# EAGLE board schematic2 (EAGLE 7.2.0)
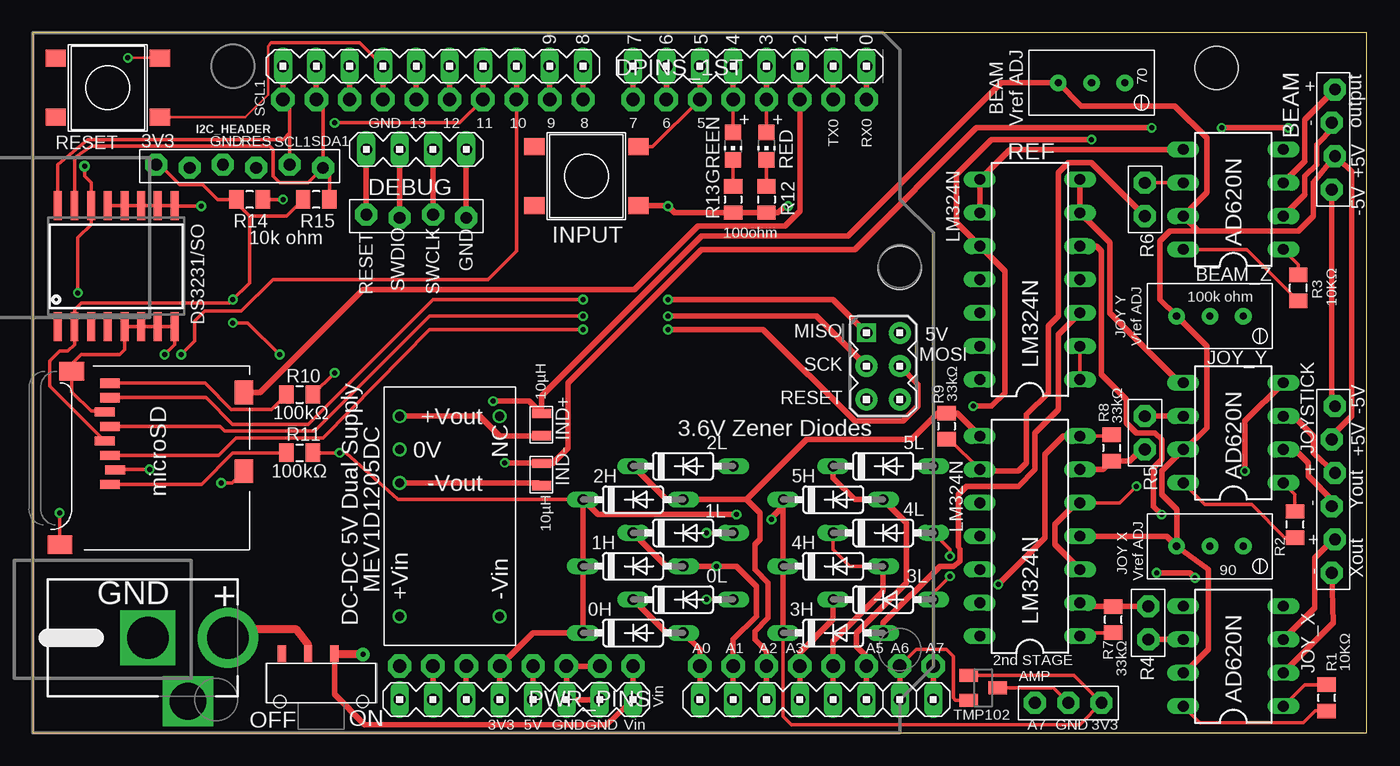
[diagram p0: board, top side]
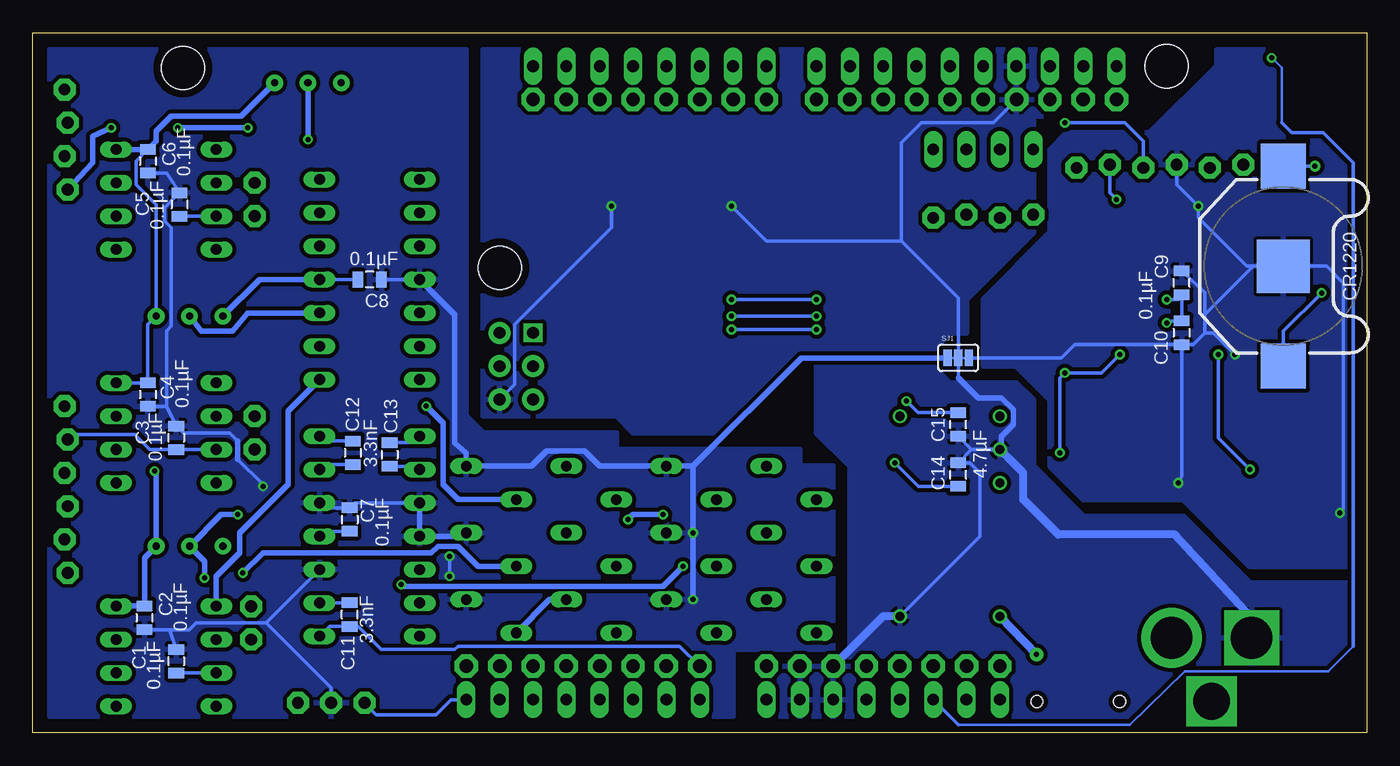
[diagram p1: board, bottom side, seen from below]

Size 101.6 x 53.34 mm. Coordinates in mm from the lower left corner, seen from the top.
Outline: 0,0 101.6,0 101.6,53.34 0,53.34 0,0
Copper layers (1*16): Top 0.0356mm / dielectric 1.5011mm / Bottom 0.0356mm
Design rules "LaenPCBOrder *": minimum track width 6mil, minimum drill 13mil, track to track 6mil, track to pad 6mil, pad to pad 6mil, via to via 6mil, smd to smd 6mil, copper to edge 15mil, drill to drill 6mil, minimum pad ring 7mil, minimum via ring 7mil, stop-mask expansion 3mil, vias tented up to drill 30mil, thermal gap 10mil

## Footprints (pad centres in the part's own frame; a part is rotated, then mirrored left to right if it is on the bottom)
DO35-7 = drill 0.813 long: A 3.81,0; C -3.81,0
R-TRIMMER_67W_TT_ELEC = drill 0.541 pad 1.27: P$1 -2.54,0; P$2 0,0; P$3 2.54,0
DIL14 = drill 0.813 long: 1 -7.62,-3.81; 2 -5.08,-3.81; 3 -2.54,-3.81; 4 0,-3.81; 5 2.54,-3.81; 6 5.08,-3.81; 7 7.62,-3.81; 8 7.62,3.81; 9 5.08,3.81; 10 2.54,3.81; 11 0,3.81; 12 -2.54,3.81; 13 -5.08,3.81; 14 -7.62,3.81
1X03 = drill 0.9 pad 1.676 octagon: 1 -2.54,0; 2 0,0; 3 2.54,0
1X08-CLEANBIG = drill 1.016 pad 1.778 octagon: 1 -8.89,0; 2 -6.35,0; 3 -3.81,0; 4 -1.27,0; 5 1.27,0; 6 3.81,0; 7 6.35,0; 8 8.89,0
1X04_LOCK = drill 0.9 pad 1.676 octagon: 1 -3.81,0.127; 2 -1.27,-0.127; 3 1.27,0.127; 4 3.81,-0.127
DIL08 = drill 0.813 long: 1 -3.81,-3.81; 2 -1.27,-3.81; 3 1.27,-3.81; 4 3.81,-3.81; 5 3.81,3.81; 6 1.27,3.81; 7 -1.27,3.81; 8 -3.81,3.81
0805 = smd 0.8 x 1.2: 1 -0.9,0; 2 0.9,0
1X10-CLEANBIG = drill 1.016 pad 1.778 octagon: 1 -11.43,0; 2 -8.89,0; 3 -6.35,0; 4 -3.81,0; 5 -1.27,0; 6 1.27,0; 7 3.81,0; 8 6.35,0; 9 8.89,0; 10 11.43,0
1X06-LOCK = drill 0.9 pad 1.676 octagon: 1 -6.35,0.127; 2 -3.81,-0.127; 3 -1.27,0.127; 4 1.27,-0.127; 5 3.81,0.127; 6 6.35,-0.127
SO16W = smd 0.6 x 2.2: 1 -4.445,-4.6; 2 -3.175,-4.6; 3 -1.905,-4.6; 4 -0.635,-4.6; 5 0.635,-4.6; 6 1.905,-4.6; 7 3.175,-4.6; 8 4.445,-4.6; 9 4.445,4.6; 10 3.175,4.6; 11 1.905,4.6; 12 0.635,4.6; 13 -0.635,4.6; 14 -1.905,4.6; 15 -3.175,4.6; 16 -4.445,4.6
I_0805 = smd 0.7 x 1.45: P$1 -0.85,0; P$2 0.85,0
PUSHBUTTON_DPST_SMD = smd 1.55 x 1.3: P 3.975,-2.25; P$1 -3.975,-2.25; S 3.975,2.25; S$1 -3.975,2.25
CHIPLED_0805 = smd 1.2 x 1.2: A 0,-1.05; C 0,1.05
R0805 = smd 1.1 x 1.4: 1 -1,0; 2 1,0
1X02 = drill 0.9 pad 1.676 octagon: 1 -1.27,0; 2 1.27,0
PAD-JUMPER-3-3OF3_NC_BY_TRACE_YES_SILK_FULL_BOX = smd 0.635 x 1.27: 1 -0.813,0; 2 0,0; 3 0.813,0
STAND-OFF = hole 3.302: 0,0
SOT23 = smd 1 x 1.4: 1 -0.95,-1.1; 2 0.95,-1.1; 3 0,1.1
DUE_HALF_SHIELD_A7-ANALOG = drill 0.9 pad 1.422 long: 2 58.42,50.8; 3 55.88,50.8; 3V3 35.56,2.54; 4 53.34,50.8; 5 50.8,50.8; 5V1 38.1,2.54; 6 48.26,50.8; 7 45.72,50.8; 8 41.91,50.8; 9 39.37,50.8; 10 36.83,50.8; 11 34.29,50.8; 12 31.75,50.8; 13 29.21,50.8; A0 50.8,2.54; A1 53.34,2.54; A2 55.88,2.54; A3 58.42,2.54; A4 60.96,2.54; A5 63.5,2.54; A6 66.04,2.54; A7 68.58,2.54; AREF 24.13,50.8; GND1 26.67,50.8; GND_1 40.64,2.54; GND_2 43.18,2.54; GND_DEBUG 33.02,44.45; IOREF1 30.48,2.54; NC1 27.94,2.54; RESET 33.02,2.54; RESET_DEBUG 25.4,44.45; RX0 63.5,50.8; SCL1 19.05,50.8; SDA1 21.59,50.8; SWCLK_DEBUG 30.48,44.45; SWDIO_DEBUG 27.94,44.45; TX0 60.96,50.8; VIN1 45.72,2.54 | drill 0.9 pad 1.676: 5V_SPI 66.04,30.48; GND_SPI 66.04,25.4; MOSI_SPI 66.04,27.94; RESET_SPI 63.5,25.4; SCK_SPI 63.5,27.94 | drill 0.9 pad 1.422 square: MISO_SPI 63.5,30.48
SWITCH_SMD_RA_SPDT = smd 0.635 x 1.27: P$1 -3,3.75; P$2 -1,3.75; P$3_COMMON 1,3.75 | hole 0.9: -3.15,0.1; 3.15,0.1
DCDC_CONVERTOR-MEV1D = drill 0.7: P$1_-VIN -7.62,-3.81; P$7_NC 7.62,-3.81; P$8_VOUT 7.62,3.81; P$9_0V 5.08,3.81; P$10_-VOUT 2.54,3.81; P$14_VIN -7.62,3.81
MICROSD = smd 0.7 x 1.5: 1 9,-10.64; 2 7.9,-10.24; 3 6.8,-10.64; 4 5.7,-11.04; 5 4.6,-10.64; 6 3.5,-11.04; 7 2.4,-10.64; 8 1.3,-10.64 | smd 1.8 x 1.4: CD1 2,-0.44; CD2 8,-0.44 | smd 1.4 x 1.9: MT1 0.4,-13.54; MT2 13.6,-14.44
CR1220_BATTERY_HOLDER_SMD = smd 4.064 x 4.064: GND 0,0 | smd 3.429 x 3.429: P$1 -7.62,0; P$2 7.62,0
POWER_JACK_DC_2,1MM = drill 3.175 pad 4.572: P$1 0,0 | drill 3.175 square: P$2 6.096,0 | drill 2.8 square: P$3 3.048,4.826

## Placement (x,y rotation side)
0H  DIODE_ZENERDO-35_AXIAL  [DO35-7]  45.72,7.62 0 top
0L  DIODE_ZENERDO-35_AXIAL  [DO35-7]  49.53,10.16 0 top
1H  DIODE_ZENERDO-35_AXIAL  [DO35-7]  45.72,12.7 0 top
1L  DIODE_ZENERDO-35_AXIAL  [DO35-7]  49.53,15.24 0 top
2H  DIODE_ZENERDO-35_AXIAL  [DO35-7]  45.72,17.78 0 top
2L  DIODE_ZENERDO-35_AXIAL  [DO35-7]  49.53,20.32 0 top
3H  3.6V_DIODE  [DO35-7]  60.96,7.62 0 top
3L  DIODE_ZENERDO-35_AXIAL  [DO35-7]  64.77,10.16 0 top
4H  DIODE_ZENERDO-35_AXIAL  [DO35-7]  60.96,12.7 0 top
4L  DIODE_ZENERDO-35_AXIAL  [DO35-7]  64.77,15.24 0 top
5H  DIODE_ZENERDO-35_AXIAL  [DO35-7]  60.96,17.78 0 top
5L  DIODE_ZENERDO-35_AXIAL  [DO35-7]  64.77,20.32 0 top
70  100k ohm  [R-TRIMMER_67W_TT_ELEC]  80.64,49.53 180 top
90  100k ohm  [R-TRIMMER_67W_TT_ELEC]  89.66,14.22 180 top
AMP  LM324N  [DIL14]  75.95,14.99 90 top
ANALOG7_HEADER  [1X03]  78.87,2.29 0 top
ANALOG_IN  [1X08-CLEANBIG]  59.69,5.08 180 top
BEAM  PINHD-1X4  [1X04_LOCK]  99.06,45.21 270 top
BEAM_Z  AD620N  [DIL08]  91.44,40.64 90 top
C1  0.1µF  [0805]  90.68,5.46 270 bottom
C2  0.1µF  [0805]  93.09,8.76 270 bottom
C3  0.1µF  [0805]  90.68,22.48 270 bottom
C4  0.1µF  [0805]  92.84,25.78 270 bottom
C5  0.1µF  [0805]  90.42,40.26 270 bottom
C6  0.1µF  [0805]  92.84,43.56 270 bottom
C7  0.1µF  [0805]  77.47,16.26 270 bottom
C8  0.1µF  [0805]  75.95,34.54 180 bottom
C9  0.1µF  [0805]  14.1,34.29 90 bottom
C10  0.1µF  [0805]  14.1,30.48 270 bottom
C11  3.3nF  [0805]  77.47,9.02 90 bottom
C12  3.3nF  [0805]  77.22,21.34 270 bottom
C13  3.3nF  [0805]  74.42,21.21 270 bottom
C14  4.7uF  [0805]  31.11,19.68 90 bottom
C15  4.7µF  [0805]  31.11,23.5 90 bottom
DEBUG  [1X04_LOCK]  29.21,39.37 180 top
DPINS_1ST  [1X08-CLEANBIG]  54.61,48.26 0 top
DPINS_2ND  PINHD-1X10CLEAN  [1X10-CLEANBIG]  30.48,48.26 0 top
I2C_HEADER  [1X06-LOCK]  15.75,43.18 180 top
IC6  DS3231/SO  [SO16W]  6.35,35.56 0 top
IND+  10µH  [I_0805]  38.73,23.5 270 top
IND-  10µH  [I_0805]  38.73,19.68 270 top
INPUT  PUSHBUTTON_DPST_SMD  [PUSHBUTTON_DPST_SMD]  42.16,42.42 180 top
JOY_X  AD620N  [DIL08]  91.44,5.84 90 top
JOY_Y  AD620N  [DIL08]  91.44,22.86 90 top
JOYSTICK  [1X06-LOCK]  99.06,18.54 90 top
LED1  GREEN  [CHIPLED_0805]  53.34,44.7 180 top
LED2  RED  [CHIPLED_0805]  55.88,44.7 180 top
PWR_PINS  [1X08-CLEANBIG]  36.83,5.08 180 top
R1  10KΩ  [R0805]  98.55,2.67 90 top
R2  10KΩ  [R0805]  96.14,15.88 90 top
R3  10KΩ  [R0805]  96.39,33.91 90 top
R4  [1X02]  84.96,8.38 90 top
R5  [1X02]  84.71,22.86 270 top
R6  [1X02]  84.71,40.64 270 top
R7  33kΩ  [R0805]  82.3,8.64 90 top
R8  33kΩ  [R0805]  82.17,21.72 270 top
R9  33kΩ  [R0805]  69.6,23.37 270 top
R10  100kΩ  [R0805]  20.32,25.78 0 top
R11  100kΩ  [R0805]  20.32,21.34 0 top
R12  100ohm  [R0805]  55.88,40.64 270 top
R13  100ohm  [R0805]  53.34,40.64 270 top
R14  10k ohm  [R0805]  16.51,40.64 180 top
R15  10k ohm  [R0805]  21.59,40.64 180 top
REF  LM324N  [DIL14]  75.95,34.54 90 top
RESET  PUSHBUTTON  [PUSHBUTTON_DPST_SMD]  5.71,49.15 180 top
SJ1  [PAD-JUMPER-3-3OF3_NC_BY_TRACE_YES_SILK_FULL_BOX]  31.11,28.57 0 bottom
STANDOFF1  STAND-OFF  [STAND-OFF]  15.24,50.8 0 top
STANDOFF2  STAND-OFF  [STAND-OFF]  66.04,35.43 0 top
STANDOFF3  STAND-OFF  [STAND-OFF]  90.17,50.67 0 top
TMP102  LM62  [SOT23]  72.39,3.43 270 top
TRIMMER  100k ohm  [R-TRIMMER_67W_TT_ELEC]  89.66,31.75 180 top
U$1  DUE_HALF_SHIELD_A7-ANALOG  [DUE_HALF_SHIELD_A7-ANALOG]  0,0 0 top
U$2  SWITCH_SLIDE_SMD_SPDT  [SWITCH_SMD_RA_SPDT]  21.97,2.29 0 top
U$3  DC-DC_CONVERTER_DUAL_SUPPLY  [DCDC_CONVERTOR-MEV1D]  31.75,16.51 90 top
U$11  MICROSD  [MICROSD]  16.51,27.94 270 top
U$12  CR1220_BATTERY_HOLDERSMD  [CR1220_BATTERY_HOLDER_SMD]  6.35,35.56 270 bottom
U$28  POWER_JACK_2,1MM  [POWER_JACK_DC_2,1MM]  14.86,7.24 180 top

## Library data of the parts
0H 0L 1H 1L 2H 2L 3H 3L 4H 4L 5H 5L AMP ANALOG7_HEADER ANALOG_IN BEAM C1-C15 DEBUG DPINS_1ST DPINS_2ND I2C_HEADER IC6 IND+ IND- INPUT JOYSTICK LED1 LED2 PWR_PINS R1-R15 REF RESET SJ1 TMP102 TRIMMER U$1-U$3 U$11 U$12 U$28 = Felicia_force_logger
70 90 STANDOFF1-STANDOFF3 = miller
BEAM_Z JOY_X JOY_Y = Felicia_force_logger; MF: ALTERA CORPORATION; MPN: AD620AN; OC_FARNELL: 1523782; OC_NEWARK: 05F7108

## Nets
5V: PWR_PINS.4 U$1.5V1
+3V3: 0H.C 1H.C 2H.C 3H.C 4H.C 5H.C ANALOG7_HEADER.3 C9.1 C10.1 I2C_HEADER.6 IC6.2 PWR_PINS.5 R10.2 R11.2 R14.2 R15.2 TMP102.1 U$1.3V3 U$11.4
+5V: 70.P$3 90.P$3 AMP.4 BEAM.3 BEAM_Z.7 C1.2 C3.2 C5.2 C7.2 C8.2 C15.2 IND+.P$1 JOY_X.7 JOY_Y.7 JOYSTICK.5 REF.4 TRIMMER.P$3
-5V: BEAM.4 C14.1 IND-.P$1 JOYSTICK.6
A0: 0H.A 0L.C AMP.1 ANALOG_IN.8 C11.1 R7.1 U$1.A0
A1: 1H.A 1L.C AMP.7 ANALOG_IN.7 C12.1 R8.1 U$1.A1
A2: 2H.A 2L.C AMP.8 ANALOG_IN.6 C13.1 R9.1 U$1.A2
A3: 3H.A 3L.C ANALOG_IN.5 REF.3 TRIMMER.P$2 U$1.A3
A4: 4H.A 4L.C 90.P$2 ANALOG_IN.4 REF.5 U$1.A4
A5: 5H.A 5L.C 70.P$2 ANALOG_IN.3 REF.10 U$1.A5
A6: ANALOG_IN.2 TMP102.2 U$1.A6
A7: ANALOG7_HEADER.1 ANALOG_IN.1 U$1.A7
AGND: 0L.A 1L.A 2L.A 3L.A 4L.A 5L.A AMP.3 AMP.5 AMP.10 AMP.11 ANALOG7_HEADER.2 C1.1 C2.2 C3.1 C4.2 C5.1 C6.2 C7.1 C8.1 REF.11 SJ1.1 TMP102.3
AREF: DPINS_2ND.3 U$1.AREF
BUTTON1: DPINS_1ST.3 INPUT.P$1 U$1.5
CARD_DETECT: DPINS_1ST.6 U$1.2 U$11.CD1
CS_SD: DPINS_2ND.8 U$1.10 U$11.2
D0: DPINS_1ST.8 U$1.RX0
D1: DPINS_1ST.7 U$1.TX0
D6: DPINS_1ST.2 U$1.6
D7: DPINS_1ST.1 U$1.7
D8: DPINS_2ND.10 U$1.8
D9: DPINS_2ND.9 U$1.9
D12: DPINS_2ND.6 U$1.12
D13: DPINS_2ND.5 U$1.13
DGND: C9.2 C10.2 I2C_HEADER.4 IC6.5 IC6.6 IC6.7 IC6.8 IC6.9 IC6.10 IC6.11 IC6.12 IC6.13 SJ1.3 U$11.6 U$11.CD2 U$11.MT1 U$11.MT2 U$12.GND
GND: C14.2 C15.1 DPINS_2ND.4 INPUT.S$1 PWR_PINS.2 PWR_PINS.3 R12.2 R13.2 RESET.S$1 SJ1.2 U$1.GND1 U$1.GND_1 U$1.GND_2 U$1.GND_SPI U$3.P$1_-VIN U$3.P$9_0V U$28.P$2
I2C_RES: DPINS_2ND.7 I2C_HEADER.3 U$1.11
IOREF: PWR_PINS.7 U$1.IOREF1
LED_GREEN: DPINS_1ST.4 LED1.A U$1.4
LED_RED: DPINS_1ST.5 LED2.A U$1.3
MISO: U$1.MISO_SPI U$11.7
MOSI: U$1.MOSI_SPI U$11.3
N$1: JOY_X.3 JOYSTICK.2
N$2: JOY_Y.1 R2.2
N$3: JOY_X.6 R4.1
N$4: BEAM_Z.6 R6.1
N$5: JOY_X.1 R1.2
N$6: JOY_X.8 R1.1
N$7: JOY_Y.8 R2.1
N$8: JOY_Y.6 R5.1
N$9: BEAM_Z.1 R3.2
N$10: BEAM_Z.8 R3.1
N$11: AMP.2 C11.2 R4.2 R7.2
N$19: JOY_X.2 JOYSTICK.1
N$21: AMP.6 C12.2 R5.2 R8.2
N$23: JOY_Y.2 JOYSTICK.3
N$24: JOY_Y.3 JOYSTICK.4
N$25: AMP.9 C13.2 R6.2 R9.2
N$28: IND-.P$2 U$3.P$10_-VOUT
N$29: IND+.P$2 U$3.P$8_VOUT
N$30: R10.1 U$11.8
N$31: BEAM.2 BEAM_Z.2
N$32: BEAM.1 BEAM_Z.3
N$33: R11.1 U$11.1
N$35: DEBUG.1 U$1.GND_DEBUG
N$36: LED1.C R13.1
N$37: LED2.C R12.1
N$38: DEBUG.2 U$1.SWCLK_DEBUG
N$39: DEBUG.3 U$1.SWDIO_DEBUG
N$40: DEBUG.4 U$1.RESET_DEBUG
REF_BEAM: BEAM_Z.5 REF.8 REF.9
REF_JOYX: JOY_Y.5 REF.6 REF.7
REF_JOYY: JOY_X.5 REF.1 REF.2
RESET: PWR_PINS.6 RESET.P$1 U$1.RESET
SCL1: DPINS_2ND.1 I2C_HEADER.2 IC6.16 R14.1 U$1.SCL1
SCLK: U$1.SCK_SPI U$11.5
SDA1: DPINS_2ND.2 I2C_HEADER.1 IC6.15 R15.1 U$1.SDA1
VBAT: IC6.14 U$12.P$1 U$12.P$2
VIN: PWR_PINS.1 U$1.VIN1 U$2.P$3_COMMON U$3.P$14_VIN
VNEG: 70.P$1 90.P$1 BEAM_Z.4 C2.1 C4.1 C6.1 JOY_X.4 JOY_Y.4 TRIMMER.P$1
VRAW: U$2.P$2 U$28.P$1

## Tracks (layer width: path | path; a pad name or v marks a point on that pad's centre or on a via)
5V
  Top 0.406: U$1.5V1 PWR_PINS.4
+3V3  (via drill 0.38, 0.38 pad 0.3)
  Top 0.254: R15.2 19.32,39.37 16.51,39.37 | 16.51,39.37 15.51,40.37 R14.2 14.1,40.64 12.95,41.78 11.18,41.78 9.65,43.31 I2C_HEADER.6 | 16.51,39.37 16.51,34.29 v15.24,33.02 14.99,32.77 3.68,32.77 3.17,32.26 IC6.2 3.17,29.59 2.67,29.08 2.03,29.08 1.27,28.32 1.27,26.44 U$11.4 | 41.91,17.02 2H.C 27.81,17.78 23.88,21.34 v23.37,21.34 R11.2 | v56.26,16.26 56.26,16.38 | v22.99,27.43 R10.2 | v15.24,31.24 16.38,31.24 v18.8,28.83 | 3H.C 57.15,1.27 57.78,0.64 79.76,0.64 ANALOG7_HEADER.3 79.31,4.38 TMP102.1
  Top 0.406: U$1.3V3 PWR_PINS.5 38.1,7.62 0H.C 1H.C 2H.C 43.05,16.64 v53.59,16.64 | 5H.C 57.15,17.27 | 57.15,17.27 4H.C 3H.C | 56.26,16.38 57.15,17.27
  Bottom 0.254: v15.24,33.02 14.34,33.02 C9.1 C10.1 15.1,31.38 v15.24,31.24 | v23.37,21.34 23.37,27.05 v22.99,27.43 20.19,27.43 v18.8,28.83
  Bottom 0.406: v53.59,16.64 55.88,16.64 v56.26,16.26
+5V  (via drill 0.38 pad 0.3)
  Top 0.254: JOY_Y.7 87.76,21.59 | JOYSTICK.5 99.06,22.73
  Top 0.406: v35.05,25.27 37.81,25.27 IND+.P$1 38.73,25.65 50.93,37.85 62.1,37.85 73.79,49.53 70.P$3 79.88,47.75 87,47.75 89.41,45.34 89.41,41.15 BEAM_Z.7 88.77,38.23 | 88.77,38.23 96.39,38.23 97.54,39.37 97.54,41.91 BEAM.3 100.46,42.8 100.46,24.13 99.06,22.73 | 88.77,38.23 86.61,38.23 85.85,37.47 85.85,33.02 TRIMMER.P$3 89.41,29.46 89.41,23.24 87.76,21.59 | JOY_X.7 87.76,4.57 89.53,6.35 89.53,12.45 90.P$3 | 90.P$3 87.12,17.02 85.98,18.16 85.98,19.94 JOY_Y.7 | AMP.4 86.36,14.99 90.P$3
  Bottom 0.254: C15.2 34.17,24.39 v35.05,25.27 | C1.2 87.64,4.56 JOY_X.7 | JOY_Y.7 89.91,21.59 C3.2 92.7,21.58 93.85,22.73 98.68,22.73 JOYSTICK.5 | BEAM_Z.7 89.91,39.37 C5.2 | C7.2 79.39,15.36 AMP.4 | REF.4 C8.2
  Bottom 0.406: REF.4 84.33,34.54 TRIMMER.P$3
-5V  (via drill 0.38, 0.38 pad 0.3)
  Top 0.254: 38.7,20.57 IND-.P$1 39.59,20.54
  Top 0.406: v35.94,20.57 38.7,20.57 | 39.59,20.54 40.77,21.72 40.77,26.67 50.93,36.83 62.61,36.83 71.88,46.1 v85.22,46.1 | BEAM.4 98.93,25.15 JOYSTICK.6 | v90.55,46.1 v95.63,46.1
  Bottom 0.254: C14.1 34.15,18.79 v35.94,20.57
  Bottom 0.406: BEAM.4 97.03,43.43 97.03,45.47 v95.63,46.1 | v85.22,46.1 v90.55,46.1
A0
  Top 0.254: R7.1 80.03,7.64 AMP.1
  Top 0.406: U$1.A0 ANALOG_IN.8 50.8,6.35 0H.A 48.26,7.62 0L.C
  Bottom 0.254: AMP.1 79,8.12 C11.1 76.82,8.12 75.06,6.35 69.47,6.35 69.22,6.6 52.32,6.6 ANALOG_IN.8
A1  (via drill 0.38)
  Top 0.254: 1H.A 48.26,12.7 | AMP.7 82.06,22.61 R8.1
  Top 0.406: U$1.A1 ANALOG_IN.7 53.34,7.11 55.12,8.89 55.12,11.18 53.59,12.7 v52.07,12.7 1H.A | 48.26,12.7 1L.C | AMP.7 78.49,22.61 77.09,21.21 77.09,14.86 v73.53,11.3
  Bottom 0.203: 73.41,11.18 v73.53,11.3
  Bottom 0.254: C12.1 79.39,22.24 AMP.7
  Bottom 0.406: v52.07,12.7 53.59,11.18 73.41,11.18
A2
  Top 0.254: R9.1 68.94,24.37
  Top 0.406: U$1.A2 ANALOG_IN.6 55.88,6.22 54.99,7.11 54.99,7.75 56.01,8.76 56.01,11.43 54.99,12.45 54.99,14.35 55.37,14.73 55.37,16.76 54.36,17.78 | 54.36,17.78 2H.A 48.26,17.78 2L.C | R9.1 70.37,24.37 AMP.8 | 68.94,24.37 66.93,22.35 64.26,22.35 63.75,22.35 58.93,22.35 54.36,17.78
  Bottom 0.254: C13.1 72.63,22.11 AMP.8
A3
  Top 0.406: U$1.A3 ANALOG_IN.5 58.42,6.1 60.96,8.64 3L.C | 3H.A 64.77,8.38 69.09,12.7 70.1,12.7 70.61,13.08 70.61,13.97 70.48,14.22 70.48,18.16 71.12,18.8 75.06,18.8 76.33,20.07 76.33,22.86 78.11,24.64 78.11,30.35 REF.3
  Bottom 0.406: REF.3 85.22,32 86.36,30.61 88.77,30.61 TRIMMER.P$2 | 3L.C 62.23,10.16 3H.A
A4  (via drill 0.38)
  Top 0.254: 4H.A 62.23,12.7 60.96,13.97 4L.C
  Top 0.406: U$1.A4 ANALOG_IN.4 60.96,6.99 64.77,10.79 4H.A | v85.6,12.19 88.14,12.19 v88.52,11.81 | REF.5 81.03,37.08 81.41,36.7 81.41,27.3 83.31,25.4 83.31,23.62 84.07,22.86 85.47,22.86 85.98,22.35 85.98,20.83 85.34,20.19 85.34,17.27 v85.98,16.64
  Bottom 0.406: v85.6,12.19 84.07,13.72 71.25,13.72 70.74,14.22 69.22,14.22 67.69,12.7 4H.A | v88.52,11.81 88.52,13.08 90.P$2 87.25,16.64 v85.98,16.64
A5  (via drill 0.38)
  Top 0.254: REF.10 72.14,36.7
  Top 0.406: U$1.A5 ANALOG_IN.3 63.5,5.84 62.74,6.6 62.74,7.62 66.55,11.43 66.55,16 5H.A 62.61,17.78 60.96,19.43 5L.C | v80.64,45.21 73.03,45.21 70.36,42.55 70.36,38.86 REF.10 74.04,35.18 74.04,25.91 73.03,24.89 v71.63,24.89
  Bottom 0.406: v80.64,45.21 70.P$2 | 5H.A 69.22,17.78 70.36,18.92 70.36,23.62 v71.63,24.89
A6
  Top 0.254: TMP102.2 70.29,2.48 70.1,2.67 70.1,5.84 69.6,6.35 67.31,6.35 ANALOG_IN.2
  Top 0.406: U$1.A6 ANALOG_IN.2
A7
  Top 0.406: U$1.A7 ANALOG_IN.1
  Bottom 0.254: U$1.A7 69.72,2.54 70.87,1.4 75.44,1.4 ANALOG7_HEADER.1
AGND  (via drill 0.38)
  Top 0.254: 5L.A 4L.A 69.85,13.97 v69.85,13.46 | 0L.A v51.31,10.16 | v51.31,15.24 1L.A | 79.5,17.53 AMP.5 82.8,17.53 v84.07,18.8 | 3L.A 68.58,10.67 v69.85,11.94 | TMP102.3 77.72,3.43 ANALOG7_HEADER.2
  Top 0.406: 79.5,17.53 77.85,15.88 77.85,14.35 AMP.3
  Bottom 0.254: C2.2 91.16,7.86 | 91.16,7.86 C1.1 | C4.2 91.42,24.88 | 91.42,24.88 C3.1 90.16,22.86 86.61,22.86 85.98,22.23 | C6.2 91.42,42.66 C5.1 91.57,40.02 91.57,38.99 91.06,38.48 91.06,30.99 91.42,30.63 91.42,24.88 | AMP.5 79.39,17.16 C7.1 77.1,17.53 AMP.10 | REF.11 C8.1 | 91.16,7.86 89.67,7.86 89.15,8.38 83.82,8.38 | 83.82,8.38 AMP.3 | 68.83,14.99 4L.A | v84.07,18.8 84.07,18.92 85.98,20.83 | v69.85,11.94 v69.85,13.46 | ANALOG7_HEADER.2 78.87,3.43 83.82,8.38
  Bottom 0.406: v51.31,10.16 v51.31,15.24 51.31,20.32 | AMP.10 AMP.11 68.83,14.99 | REF.11 69.47,31.88 69.47,22.1 68.58,21.34 5L.A 63.63,20.32 62.48,21.46 59.56,21.46 58.42,20.32 2L.A 51.31,20.32 | 85.98,20.83 85.98,22.23 | SJ1.1 43.05,28.57 51.31,20.32
  pour Bottom (isolate 0.305): 68.58,52.07 100.33,52.07 100.33,1.27 48.26,1.27 48.26,6.35 40.64,6.35 40.64,7.62 40.64,20.32 43.18,20.32 43.18,21.59 57.15,21.59 57.15,22.86 67.31,22.86 68.58,24.13
AREF
  Top 0.406: U$1.AREF DPINS_2ND.3
BUTTON1
  Top 0.254: 50.71,48.17 DPINS_1ST.3 47.21,44.67 INPUT.P$1
  Top 0.406: U$1.5 DPINS_1ST.3
CARD_DETECT
  Top 0.406: U$1.2 DPINS_1ST.6 58.42,39.75 57.28,38.61 50.67,38.61 45.85,33.78 25.15,33.78 17.3,25.94 U$11.CD1
CS_SD  (via drill 0.38)
  Top 0.254: DPINS_2ND.8 36.83,36.7 34.67,34.54 18.29,34.54 15.88,32.13 13.08,32.13 12.32,31.37 12.32,29.84 v11.3,28.83 | v8.89,20.07 6.3,20.07 U$11.2
  Top 0.406: U$1.10 DPINS_2ND.8
  Bottom 0.254: v11.3,28.83 11.3,22.48 v8.89,20.07
D0
  Top 0.406: U$1.RX0 DPINS_1ST.8
D1
  Top 0.406: U$1.TX0 DPINS_1ST.7
D6
  Top 0.406: U$1.6 DPINS_1ST.2
D7
  Top 0.406: U$1.7 DPINS_1ST.1
D8
  Top 0.406: U$1.8 DPINS_2ND.10
D9
  Top 0.406: U$1.9 DPINS_2ND.9
D12
  Top 0.406: U$1.12 DPINS_2ND.6
D13
  Top 0.406: U$1.13 DPINS_2ND.5
DGND  (via drill 0.38)
  Top 0.254: IC6.13 IC6.12 IC6.11 IC6.10 IC6.9 10.82,40.13 v12.83,40.13 | U$11.6 5.4,24.51 4.45,24.51 2.97,25.99 U$11.MT1 2.97,28.12 3.68,28.83 6.6,28.83 6.99,29.21 IC6.5 IC6.6 IC6.7 IC6.8 10.79,29.59 v10.03,28.83 | v14.35,19.05 15.18,19.05 U$11.CD2 | v2.03,16.76 2.03,14.38 U$11.MT2
  Bottom 0.254: C10.2 13.22,29.58 12.32,30.48 | 12.32,30.48 12.32,31.88 | 12.32,31.88 8.64,35.56 | 8.64,35.56 U$12.GND 3.05,35.56 1.78,34.29 1.78,17.02 v2.03,16.76 | 12.32,31.88 12.32,33.54 C9.2 | SJ1.3 23.24,28.57 22.23,29.59 13.98,29.59 C10.2 | C10.2 14.1,19.56 v14.35,19.05 | I2C_HEADER.4 14.48,41.78 v12.83,40.13 12.83,39.24 9.14,35.56 8.64,35.56 | v10.03,28.83 11.68,30.48 12.32,30.48
  pour Bottom (isolate 0.305): 1.27,12.7 8.89,12.7 13.97,17.78 21.59,17.78 24.13,20.32 24.13,25.4 26.67,27.94 29.21,27.94 29.21,33.02 24.13,38.1 24.13,44.45 22.86,45.72 16.51,45.72 11.43,50.8 11.43,52.07 1.27,52.07
GND  (via drill 0.38)
  Top 0.203: RESET.S$1 16.16,46.9 17.91,48.64 17.91,52.32 18.16,52.58
  Top 0.254: 18.16,52.58 24.89,52.58 U$1.GND1 | v57.53,40.13 57.28,40.13 | 55.9,39.62 R12.2 | 48.35,40.17 v48.39,40.13
  Top 0.406: U$1.GND_2 U$1.GND_1 PWR_PINS.3 PWR_PINS.2 | U$1.GND1 DPINS_2ND.4 | R12.2 R13.2 48.88,39.64 v48.39,40.13 | 57.28,40.13 56.77,39.62 55.9,39.62 | INPUT.S$1 48.35,40.17
  Bottom 0.203: 27.82,21.71 U$3.P$9_0V
  Bottom 0.254: U$3.P$9_0V 30.11,21.59 | 30.11,21.59 C15.1 | 30.11,21.59 C14.2 30.24,20.59 29.46,19.81 29.46,14.99 U$3.P$1_-VIN | 35.43,37.47 31.11,33.15 SJ1.2 31.11,27.05 | 35.43,37.47 35.43,44.96 33.91,46.48 28.45,46.48 DPINS_2ND.4 | U$1.GND_SPI 64.9,26.54 64.9,31.11 57.53,38.48 v57.53,40.13 | 35.43,37.47 45.72,37.47 v48.39,40.13
  Bottom 0.406: 31.11,27.05 29.59,25.53 27.81,25.53 26.92,24.64 26.92,23.5 27.82,22.59 27.82,21.71
  Bottom 0.61: U$3.P$1_-VIN 36.83,8.89 PWR_PINS.3 | 8.76,8.76 14.61,15.11 23.5,15.11 26.16,17.78 26.16,19.81 U$3.P$9_0V
  Bottom 0.813: U$28.P$2 8.76,8.76
  pour Bottom (isolate 0.305): 1.27,11.43 1.27,1.27 46.99,1.27 46.99,5.08 40.64,5.08 39.37,6.35 39.37,20.32 41.91,22.86 41.91,27.94 33.02,27.94 31.75,26.67 26.67,26.67 25.4,25.4 25.4,20.32 21.59,16.51 13.97,16.51 8.89,11.43
  pour Bottom (isolate 0.305): 17.78,52.07 17.78,46.99 25.4,46.99 25.4,38.1 30.48,33.02 30.48,30.48 31.75,30.48 33.02,29.21 43.18,29.21 49.53,22.86 55.88,22.86 57.15,24.13 67.31,24.13 67.31,52.07
I2C_RES  (via drill 0.38)
  Top 0.254: v22.99,46.48 32.51,46.48 DPINS_2ND.7
  Top 0.406: DPINS_2ND.7 U$1.11
  Bottom 0.254: I2C_HEADER.3 17.02,45.09 18.41,46.48 v22.99,46.48
IOREF
  Top 0.406: U$1.IOREF1 PWR_PINS.7
LED_GREEN
  Top 0.254: LED1.A DPINS_1ST.4
  Top 0.406: U$1.4 DPINS_1ST.4
LED_RED
  Top 0.254: LED2.A DPINS_1ST.5
  Top 0.406: U$1.3 DPINS_1ST.5
MISO  (via drill 0.38)
  Top 0.254: v41.91,33.02 30.48,33.02 20.95,23.5 15.24,23.5 13.2,25.54 U$11.7
  Top 0.406: v48.39,33.02 60.96,33.02 U$1.MISO_SPI
  Bottom 0.254: v41.91,33.02 v48.39,33.02
MOSI  (via drill 0.38)
  Top 0.254: v41.91,30.73 30.23,30.73 22.1,22.48 15.49,22.48 14.15,21.14 U$11.3
  Top 0.406: v48.39,30.73 55.63,30.73 62.61,23.75 66.29,23.75 67.44,24.89 67.44,26.54 U$1.MOSI_SPI
  Bottom 0.254: v41.91,30.73 v48.39,30.73
N$1
  Top 0.254: JOYSTICK.2 99.06,14.73
  Top 0.406: 99.06,14.73 97.66,13.34 97.66,9.53 JOY_X.3
N$2
  Top 0.254: R2.2 96.14,18.16 JOY_Y.1
N$3
  Top 0.406: JOY_X.6 R4.1
N$4
  Top 0.254: BEAM_Z.6 R6.1
N$5
  Top 0.254: R1.2 96.89,3.67 JOY_X.1
N$6
  Top 0.254: R1.1 97.68,1.67 96.77,0.76 88.9,0.76 JOY_X.8
N$7
  Top 0.254: R2.1 95.36,14.88 92.84,17.4 89.28,17.4 JOY_Y.8
N$8
  Top 0.406: JOY_Y.6 R5.1
N$9
  Top 0.254: R3.2 96.39,35.69 BEAM_Z.1
N$10
  Top 0.254: BEAM_Z.8 92.47,36.83 R3.1
N$11
  Top 0.254: 82.31,9.65 R7.2
  Top 0.406: R4.2 82.31,9.65 | R7.2 80.03,9.64 AMP.2
  Bottom 0.254: C11.2 79.75,9.92 AMP.2
N$19
  Top 0.406: JOYSTICK.1 99.06,8.38 JOY_X.2
N$21
  Top 0.254: R5.2 84.45,21.59 | 82.19,20.7 R8.2
  Top 0.406: 84.45,21.59 83.57,20.7 82.19,20.7 | AMP.6 81.52,20.07 R8.2
  Bottom 0.254: C12.2 79.39,20.44 AMP.6
N$23
  Top 0.254: JOYSTICK.3 99.06,17.65
  Top 0.406: 99.06,17.65 97.16,19.56 97.16,20.57 96.14,21.59 JOY_Y.2
N$24
  Top 0.406: JOYSTICK.4 97.54,21.34 97.54,22.61 96.01,24.13 JOY_Y.3
N$25
  Top 0.254: R9.2 69.83,22.37 AMP.9 72.26,19.94
  Top 0.406: R6.2 80.64,43.43 78.87,43.43 78.11,42.67 78.11,31.75 77.34,30.99 77.34,25.91 75.69,24.26 75.69,20.57 75.06,19.94 72.26,19.94
  Bottom 0.254: C13.2 72.38,20.31 AMP.9
N$28
  Top 0.254: 38.52,19.05 IND-.P$2
  Top 0.406: U$3.P$10_-VOUT 38.52,19.05
N$29
  Top 0.254: 38.7,22.61 IND+.P$2
  Top 0.406: U$3.P$8_VOUT 34.04,24.13 35.56,22.61 38.7,22.61
N$30
  Top 0.254: U$11.8 13.11,26.64 15.11,24.64 18.18,24.64 R10.1
N$31
  Top 0.254: BEAM.2 99.06,46.1
  Top 0.406: 99.06,46.1 97.79,44.83 97.79,43.31 96.9,42.42 96.9,41.02 BEAM_Z.2
N$32
  Top 0.406: BEAM.1 96.9,46.74 96.9,43.56 BEAM_Z.3
N$33
  Top 0.254: R11.1 15.24,21.34 12.84,18.94 U$11.1
N$35
  Top 0.406: DEBUG.1 U$1.GND_DEBUG
N$36
  Top 0.254: LED1.C R13.1
N$37
  Top 0.254: LED2.C R12.1
N$38
  Top 0.406: DEBUG.2 U$1.SWCLK_DEBUG
N$39
  Top 0.406: DEBUG.3 U$1.SWDIO_DEBUG
N$40
  Top 0.406: DEBUG.4 U$1.RESET_DEBUG
REF_BEAM
  Top 0.406: REF.9 REF.8 74.42,44.45 BEAM_Z.5
REF_JOYX
  Top 0.254: JOY_Y.5 87.38,26.67
  Top 0.406: 87.38,26.67 82.04,32 82.04,37.34 REF.6 REF.7
REF_JOYY
  Top 0.254: REF.1 REF.2
  Bottom 0.406: JOY_X.5 87.63,11.94 85.85,13.72 85.85,15.24 82.17,18.92 82.17,24.51 REF.1
RESET  (via drill 0.38)
  Top 0.203: v7.24,51.44 9.65,51.44 RESET.P$1
  Top 0.406: U$1.RESET PWR_PINS.6
  Bottom 0.203: 6.48,46.48 6.48,50.67 v7.24,51.44 | 1.02,6.6 2.92,4.7 13.84,4.7 18.03,0.64 31.11,0.64
  Bottom 0.254: 1.02,6.6 1.02,43.43 3.3,45.72 5.71,45.72 6.48,46.48 | 31.11,0.64 U$1.RESET
SCL1  (via drill 0.38 pad 0.3)
  Top 0.254: R14.1 v19.05,40.64 | IC6.16 1.91,43.31 4.19,45.21 19.05,45.21 19.56,45.72 | I2C_HEADER.2 19.56,45.72 | 19.56,45.72 19.56,47.75 DPINS_2ND.1
  Top 0.406: U$1.SCL1 DPINS_2ND.1
  Bottom 0.254: I2C_HEADER.2 19.56,41.15 v19.05,40.64
SCLK  (via drill 0.38)
  Top 0.254: v41.91,31.75 30.23,31.75 21.46,22.99 14.61,22.99 14.25,23.34 U$11.5
  Top 0.406: v48.39,31.75 59.69,31.75 U$1.SCK_SPI
  Bottom 0.254: v41.91,31.75 v48.39,31.75
SDA1
  Top 0.254: IC6.15 3.17,43.81 4.45,44.7 18.03,44.7 18.29,44.45 18.29,42.42 18.8,41.91 20.95,41.91 I2C_HEADER.1 | I2C_HEADER.1 22.1,47.75 DPINS_2ND.2 | R15.1 22.59,42.56 I2C_HEADER.1
  Top 0.406: U$1.SDA1 DPINS_2ND.2
VBAT  (via drill 0.38, 0.38 pad 0.81)
  Top 0.254: v3.94,43.18 3.94,42.42 4.45,41.91 IC6.14 4.45,38.73 3.43,37.72 v3.43,33.53
  Bottom 0.254: U$12.P$1 v3.94,43.18 | U$12.P$2 6.35,30.61 v3.43,33.53
VIN  (via drill 0.38 pad 1.02)
  Top 0.254: 23.04,5.97 U$2.P$3_COMMON
  Top 0.406: PWR_PINS.1 U$1.VIN1 43.69,0.64 25.27,0.64 22.97,2.94 U$2.P$3_COMMON
  Top 0.61: v25.15,5.97 23.04,5.97
  Bottom 0.61: U$3.P$14_VIN v25.15,5.97
VNEG  (via drill 0.38)
  Top 0.406: v92.33,19.94 92.33,23.75 JOY_Y.4
  Bottom 0.254: 95.24,9.66 JOY_X.4 | JOY_Y.4 C4.1 92.84,31.11 TRIMMER.P$1 92.2,40.26 93.73,41.78 93.73,43.57 C6.1 | 92.2,19.81 v92.33,19.94
  Bottom 0.406: 95.24,9.66 C2.1 93.09,13.34 90.P$1 92.2,19.81 | BEAM_Z.4 C6.1 | C6.1 92.2,45.1 92.2,45.85 91.06,46.99 89.53,46.99 85.72,46.99 70.P$1
VRAW
  Top 0.254: U$2.P$2 20.97,6.71
  Top 0.61: 20.97,6.71 20.07,7.87 15.49,7.87
  Top 0.813: 15.49,7.87 U$28.P$1

## Text on the board
tPlace: LM324N | LM324N
tNames: 9 | 8 | 7 | 6 | 5 | 4 | 3 | 2 | 1 | 0 | BEAM / Vref ADJ | + | SCL1 | output | GND | 13 | 12 | 11 | 10 | 9 | 8 | 7 | 6 | 5 | TX0 | RX0 | - | 3V3 | GND | RES | SCL1 | SDA1 | +5V | -5V | GND | SWDIO | RESET | SWCLK | JOY Y / Vref ADJ | MISO | 5V | MOSI | SCK | RESET | -5V | 3.6V Zener Diodes | +5V | microSD | + | Yout | - | DC-DC 5V Dual Supply | MEV1D1205DC | + | JOY X / Vref ADJ | Xout | - | A0 | A1 | A2 | A3 | A5 | A6 | A7 | 2nd STAGE / AMP | Vin | OFF | ON | 3V3 | 5V | GND | GND | Vin | TMP102 | A7 | GND | 3V3
bNames: CR1220